# EAGLE board VCNL4040 Panel (EAGLE 7.7.0)
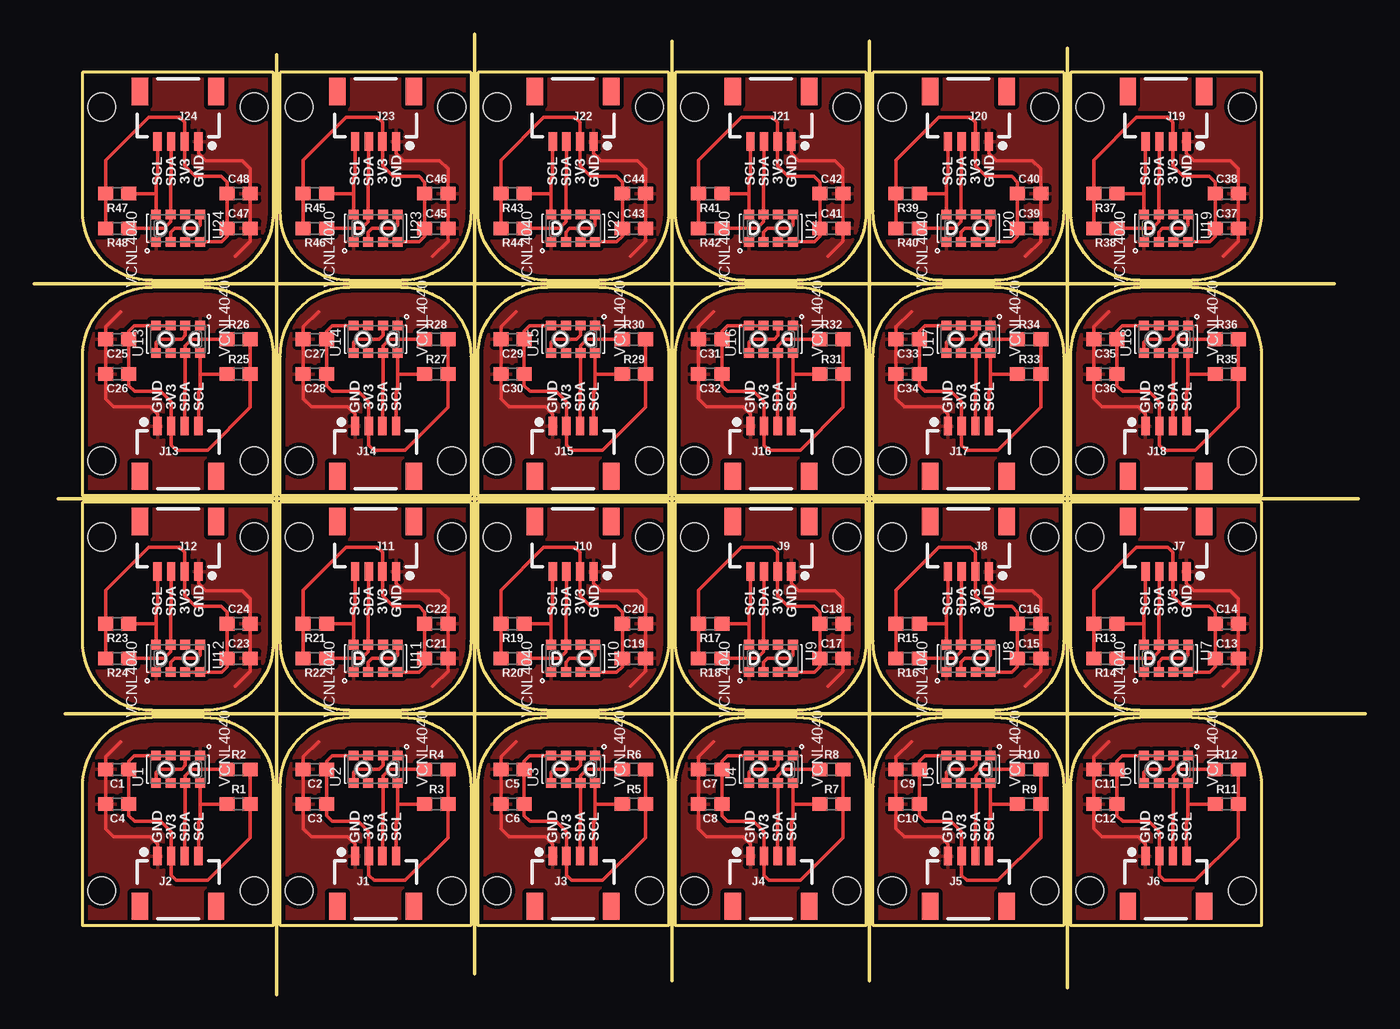
[diagram p0: board, top side]
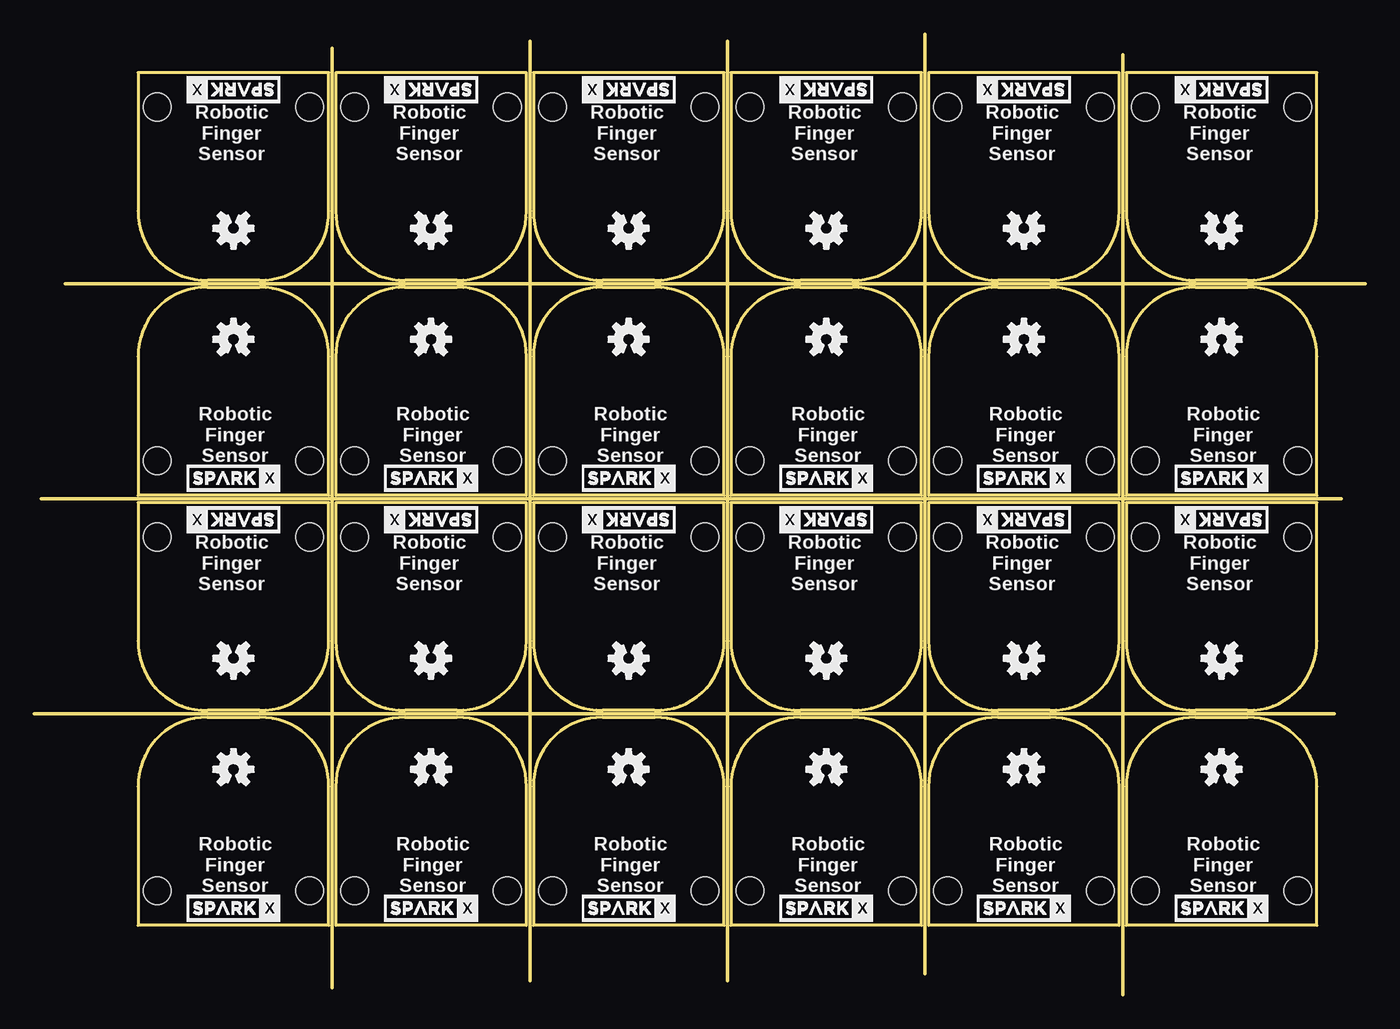
[diagram p1: board, bottom side, seen from below]

Size 97.54 x 70.36 mm. Coordinates in mm from the lower left corner, seen from the top.
Outline: 17.78,68.83 17.78,0
Outline: 32.26,70.36 32.26,1.52
Outline: 46.74,69.85 46.74,1.02
Outline: 61.21,69.85 61.21,1.02
Outline: 75.69,69.34 75.69,0.51
Outline: 2.29,20.57 97.54,20.57
Outline: 1.78,36.32 97.03,36.32
Outline: 0,52.07 95.25,52.07
Outline: 3.56,5.08 17.53,5.08 17.53,15.24 arc92 12.45,20.32 8.64,20.32 arc92 3.56,15.24 3.56,5.08
Outline: 18.03,5.08 32,5.08 32,15.24 arc92 26.92,20.32 23.11,20.32 arc92 18.03,15.24 18.03,5.08
Outline: 32.51,5.08 46.48,5.08 46.48,15.24 arc92 41.4,20.32 37.59,20.32 arc92 32.51,15.24 32.51,5.08
Outline: 46.99,5.08 60.96,5.08 60.96,15.24 arc92 55.88,20.32 52.07,20.32 arc92 46.99,15.24 46.99,5.08
Outline: 61.47,5.08 75.44,5.08 75.44,15.24 arc92 70.36,20.32 66.55,20.32 arc92 61.47,15.24 61.47,5.08
Outline: 75.95,5.08 89.92,5.08 89.92,15.24 arc92 84.84,20.32 81.03,20.32 arc92 75.95,15.24 75.95,5.08
Outline: 89.92,36.07 75.95,36.07 75.95,25.91 arc92 81.03,20.83 84.84,20.83 arc92 89.92,25.91 89.92,36.07
Outline: 75.44,36.07 61.47,36.07 61.47,25.91 arc92 66.55,20.83 70.36,20.83 arc92 75.44,25.91 75.44,36.07
Outline: 60.96,36.07 46.99,36.07 46.99,25.91 arc92 52.07,20.83 55.88,20.83 arc92 60.96,25.91 60.96,36.07
Outline: 46.48,36.07 32.51,36.07 32.51,25.91 arc92 37.59,20.83 41.4,20.83 arc92 46.48,25.91 46.48,36.07
Outline: 32,36.07 18.03,36.07 18.03,25.91 arc92 23.11,20.83 26.92,20.83 arc92 32,25.91 32,36.07
Outline: 17.53,36.07 3.56,36.07 3.56,25.91 arc92 8.64,20.83 12.45,20.83 arc92 17.53,25.91 17.53,36.07
Outline: 3.56,36.58 17.53,36.58 17.53,46.74 arc92 12.45,51.82 8.64,51.82 arc92 3.56,46.74 3.56,36.58
Outline: 18.03,36.58 32,36.58 32,46.74 arc92 26.92,51.82 23.11,51.82 arc92 18.03,46.74 18.03,36.58
Outline: 32.51,36.58 46.48,36.58 46.48,46.74 arc92 41.4,51.82 37.59,51.82 arc92 32.51,46.74 32.51,36.58
Outline: 46.99,36.58 60.96,36.58 60.96,46.74 arc92 55.88,51.82 52.07,51.82 arc92 46.99,46.74 46.99,36.58
Outline: 61.47,36.58 75.44,36.58 75.44,46.74 arc92 70.36,51.82 66.55,51.82 arc92 61.47,46.74 61.47,36.58
Outline: 75.95,36.58 89.92,36.58 89.92,46.74 arc92 84.84,51.82 81.03,51.82 arc92 75.95,46.74 75.95,36.58
Outline: 89.92,67.56 75.95,67.56 75.95,57.4 arc92 81.03,52.32 84.84,52.32 arc92 89.92,57.4 89.92,67.56
Outline: 75.44,67.56 61.47,67.56 61.47,57.4 arc92 66.55,52.32 70.36,52.32 arc92 75.44,57.4 75.44,67.56
Outline: 60.96,67.56 46.99,67.56 46.99,57.4 arc92 52.07,52.32 55.88,52.32 arc92 60.96,57.4 60.96,67.56
Outline: 46.48,67.56 32.51,67.56 32.51,57.4 arc92 37.59,52.32 41.4,52.32 arc92 46.48,57.4 46.48,67.56
Outline: 32,67.56 18.03,67.56 18.03,57.4 arc92 23.11,52.32 26.92,52.32 arc92 32,57.4 32,67.56
Outline: 17.53,67.56 3.56,67.56 3.56,57.4 arc92 8.64,52.32 12.45,52.32 arc92 17.53,57.4 17.53,67.56
Copper layers (1*16): Top 0.035mm / dielectric 1.5mm / Bottom 0.035mm
Design rules "SparkFun-2-layer-TIGHT": minimum track width 7mil, minimum drill 15mil, track to track 7mil, track to pad 7mil, pad to pad 7mil, via to via 7mil, smd to smd 7mil, copper to edge 7mil, drill to drill 7mil, minimum pad ring 7mil, minimum via ring 7mil, stop-mask expansion 4mil, vias tented up to drill 25mil, thermal gap 10mil

## Footprints (pad centres in the part's own frame; a part is rotated, then mirrored left to right if it is on the bottom)
0603 = smd 1.1 x 1: 1 -0.85,0; 2 0.85,0
1X04_1MM_RA = smd 0.6 x 1.35: 1 -1.5,0; 2 -0.5,0; 3 0.5,0; 4 1.5,0 | smd 1.2 x 2: NC1 2.8,-3.675; NC2 -2.8,-3.675
VCNL4040 = smd 0.7 x 0.725: 1 1,-1.613; 2 1,-0.537; 3 1,0.537; 4 1,1.613; 5 -1,1.613; 6 -1,0.537; 7 -1,-0.537; 8 -1,-1.613
STAND-OFF-#2 = hole 2.032: 0,0

## Placement (x,y rotation side)
C1  2.2uF  [0603]  6.1,16.51 180 top
C2  2.2uF  [0603]  20.57,16.51 180 top
C3  0.1uF  [0603]  20.57,13.97 180 top
C4  0.1uF  [0603]  6.1,13.97 180 top
C5  2.2uF  [0603]  35.05,16.51 180 top
C6  0.1uF  [0603]  35.05,13.97 180 top
C7  2.2uF  [0603]  49.53,16.51 180 top
C8  0.1uF  [0603]  49.53,13.97 180 top
C9  2.2uF  [0603]  64.01,16.51 180 top
C10  0.1uF  [0603]  64.01,13.97 180 top
C11  2.2uF  [0603]  78.49,16.51 180 top
C12  0.1uF  [0603]  78.49,13.97 180 top
C13  2.2uF  [0603]  87.38,24.64 0 top
C14  0.1uF  [0603]  87.38,27.18 0 top
C15  2.2uF  [0603]  72.9,24.64 0 top
C16  0.1uF  [0603]  72.9,27.18 0 top
C17  2.2uF  [0603]  58.42,24.64 0 top
C18  0.1uF  [0603]  58.42,27.18 0 top
C19  2.2uF  [0603]  43.94,24.64 0 top
C20  0.1uF  [0603]  43.94,27.18 0 top
C21  2.2uF  [0603]  29.46,24.64 0 top
C22  0.1uF  [0603]  29.46,27.18 0 top
C23  2.2uF  [0603]  14.99,24.64 0 top
C24  0.1uF  [0603]  14.99,27.18 0 top
C25  2.2uF  [0603]  6.1,48.01 180 top
C26  0.1uF  [0603]  6.1,45.47 180 top
C27  2.2uF  [0603]  20.57,48.01 180 top
C28  0.1uF  [0603]  20.57,45.47 180 top
C29  2.2uF  [0603]  35.05,48.01 180 top
C30  0.1uF  [0603]  35.05,45.47 180 top
C31  2.2uF  [0603]  49.53,48.01 180 top
C32  0.1uF  [0603]  49.53,45.47 180 top
C33  2.2uF  [0603]  64.01,48.01 180 top
C34  0.1uF  [0603]  64.01,45.47 180 top
C35  2.2uF  [0603]  78.49,48.01 180 top
C36  0.1uF  [0603]  78.49,45.47 180 top
C37  2.2uF  [0603]  87.38,56.13 0 top
C38  0.1uF  [0603]  87.38,58.67 0 top
C39  2.2uF  [0603]  72.9,56.13 0 top
C40  0.1uF  [0603]  72.9,58.67 0 top
C41  2.2uF  [0603]  58.42,56.13 0 top
C42  0.1uF  [0603]  58.42,58.67 0 top
C43  2.2uF  [0603]  43.94,56.13 0 top
C44  0.1uF  [0603]  43.94,58.67 0 top
C45  2.2uF  [0603]  29.46,56.13 0 top
C46  0.1uF  [0603]  29.46,58.67 0 top
C47  2.2uF  [0603]  14.99,56.13 0 top
C48  0.1uF  [0603]  14.99,58.67 0 top
J1  [1X04_1MM_RA]  25.02,10.16 0 top
J2  [1X04_1MM_RA]  10.54,10.16 0 top
J3  [1X04_1MM_RA]  39.5,10.16 0 top
J4  [1X04_1MM_RA]  53.97,10.16 0 top
J5  [1X04_1MM_RA]  68.45,10.16 0 top
J6  [1X04_1MM_RA]  82.93,10.16 0 top
J7  [1X04_1MM_RA]  82.93,30.99 180 top
J8  [1X04_1MM_RA]  68.45,30.99 180 top
J9  [1X04_1MM_RA]  53.97,30.99 180 top
J10  [1X04_1MM_RA]  39.5,30.99 180 top
J11  [1X04_1MM_RA]  25.02,30.99 180 top
J12  [1X04_1MM_RA]  10.54,30.99 180 top
J13  [1X04_1MM_RA]  10.54,41.66 0 top
J14  [1X04_1MM_RA]  25.02,41.66 0 top
J15  [1X04_1MM_RA]  39.5,41.66 0 top
J16  [1X04_1MM_RA]  53.97,41.66 0 top
J17  [1X04_1MM_RA]  68.45,41.66 0 top
J18  [1X04_1MM_RA]  82.93,41.66 0 top
J19  [1X04_1MM_RA]  82.93,62.48 180 top
J20  [1X04_1MM_RA]  68.45,62.48 180 top
J21  [1X04_1MM_RA]  53.97,62.48 180 top
J22  [1X04_1MM_RA]  39.5,62.48 180 top
J23  [1X04_1MM_RA]  25.02,62.48 180 top
J24  [1X04_1MM_RA]  10.54,62.48 180 top
R1  2.2k  [0603]  14.99,13.97 0 top
R2  2.2k  [0603]  14.99,16.51 0 top
R3  2.2k  [0603]  29.46,13.97 0 top
R4  2.2k  [0603]  29.46,16.51 0 top
R5  2.2k  [0603]  43.94,13.97 0 top
R6  2.2k  [0603]  43.94,16.51 0 top
R7  2.2k  [0603]  58.42,13.97 0 top
R8  2.2k  [0603]  58.42,16.51 0 top
R9  2.2k  [0603]  72.9,13.97 0 top
R10  2.2k  [0603]  72.9,16.51 0 top
R11  2.2k  [0603]  87.38,13.97 0 top
R12  2.2k  [0603]  87.38,16.51 0 top
R13  2.2k  [0603]  78.49,27.18 180 top
R14  2.2k  [0603]  78.49,24.64 180 top
R15  2.2k  [0603]  64.01,27.18 180 top
R16  2.2k  [0603]  64.01,24.64 180 top
R17  2.2k  [0603]  49.53,27.18 180 top
R18  2.2k  [0603]  49.53,24.64 180 top
R19  2.2k  [0603]  35.05,27.18 180 top
R20  2.2k  [0603]  35.05,24.64 180 top
R21  2.2k  [0603]  20.57,27.18 180 top
R22  2.2k  [0603]  20.57,24.64 180 top
R23  2.2k  [0603]  6.1,27.18 180 top
R24  2.2k  [0603]  6.1,24.64 180 top
R25  2.2k  [0603]  14.99,45.47 0 top
R26  2.2k  [0603]  14.99,48.01 0 top
R27  2.2k  [0603]  29.46,45.47 0 top
R28  2.2k  [0603]  29.46,48.01 0 top
R29  2.2k  [0603]  43.94,45.47 0 top
R30  2.2k  [0603]  43.94,48.01 0 top
R31  2.2k  [0603]  58.42,45.47 0 top
R32  2.2k  [0603]  58.42,48.01 0 top
R33  2.2k  [0603]  72.9,45.47 0 top
R34  2.2k  [0603]  72.9,48.01 0 top
R35  2.2k  [0603]  87.38,45.47 0 top
R36  2.2k  [0603]  87.38,48.01 0 top
R37  2.2k  [0603]  78.49,58.67 180 top
R38  2.2k  [0603]  78.49,56.13 180 top
R39  2.2k  [0603]  64.01,58.67 180 top
R40  2.2k  [0603]  64.01,56.13 180 top
R41  2.2k  [0603]  49.53,58.67 180 top
R42  2.2k  [0603]  49.53,56.13 180 top
R43  2.2k  [0603]  35.05,58.67 180 top
R44  2.2k  [0603]  35.05,56.13 180 top
R45  2.2k  [0603]  20.57,58.67 180 top
R46  2.2k  [0603]  20.57,56.13 180 top
R47  2.2k  [0603]  6.1,58.67 180 top
R48  2.2k  [0603]  6.1,56.13 180 top
U1  VCNL4040  [VCNL4040]  10.54,16.51 90 top
U2  VCNL4040  [VCNL4040]  25.02,16.51 90 top
U3  VCNL4040  [VCNL4040]  39.5,16.51 90 top
U4  VCNL4040  [VCNL4040]  53.97,16.51 90 top
U5  VCNL4040  [VCNL4040]  68.45,16.51 90 top
U6  VCNL4040  [VCNL4040]  82.93,16.51 90 top
U7  VCNL4040  [VCNL4040]  82.93,24.64 270 top
U8  VCNL4040  [VCNL4040]  68.45,24.64 270 top
U9  VCNL4040  [VCNL4040]  53.97,24.64 270 top
U10  VCNL4040  [VCNL4040]  39.5,24.64 270 top
U11  VCNL4040  [VCNL4040]  25.02,24.64 270 top
U12  VCNL4040  [VCNL4040]  10.54,24.64 270 top
U13  VCNL4040  [VCNL4040]  10.54,48.01 90 top
U14  VCNL4040  [VCNL4040]  25.02,48.01 90 top
U15  VCNL4040  [VCNL4040]  39.5,48.01 90 top
U16  VCNL4040  [VCNL4040]  53.97,48.01 90 top
U17  VCNL4040  [VCNL4040]  68.45,48.01 90 top
U18  VCNL4040  [VCNL4040]  82.93,48.01 90 top
U19  VCNL4040  [VCNL4040]  82.93,56.13 270 top
U20  VCNL4040  [VCNL4040]  68.45,56.13 270 top
U21  VCNL4040  [VCNL4040]  53.97,56.13 270 top
U22  VCNL4040  [VCNL4040]  39.5,56.13 270 top
U23  VCNL4040  [VCNL4040]  25.02,56.13 270 top
U24  VCNL4040  [VCNL4040]  10.54,56.13 270 top
U$1  OSHW-LOGOS  [OSHW-LOGO-S]  10.54,16.51 0 bottom
U$2  SPARKX-LOGO3  [SPARKX-SMALL]  10.54,6.35 0 bottom
U$3  STAND-OFF  [STAND-OFF-#2]  4.95,7.62 0 top
U$4  STAND-OFF  [STAND-OFF-#2]  16.13,7.62 0 top
U$5  OSHW-LOGOS  [OSHW-LOGO-S]  25.02,16.51 0 bottom
U$6  SPARKX-LOGO3  [SPARKX-SMALL]  25.02,6.35 0 bottom
U$7  STAND-OFF  [STAND-OFF-#2]  19.43,7.62 0 top
U$8  STAND-OFF  [STAND-OFF-#2]  30.61,7.62 0 top
U$9  OSHW-LOGOS  [OSHW-LOGO-S]  39.5,16.51 0 bottom
U$10  SPARKX-LOGO3  [SPARKX-SMALL]  39.5,6.35 0 bottom
U$11  STAND-OFF  [STAND-OFF-#2]  33.91,7.62 0 top
U$12  STAND-OFF  [STAND-OFF-#2]  45.09,7.62 0 top
U$13  OSHW-LOGOS  [OSHW-LOGO-S]  53.97,16.51 0 bottom
U$14  SPARKX-LOGO3  [SPARKX-SMALL]  53.97,6.35 0 bottom
U$15  STAND-OFF  [STAND-OFF-#2]  48.39,7.62 0 top
U$16  STAND-OFF  [STAND-OFF-#2]  59.56,7.62 0 top
U$17  OSHW-LOGOS  [OSHW-LOGO-S]  68.45,16.51 0 bottom
U$18  SPARKX-LOGO3  [SPARKX-SMALL]  68.45,6.35 0 bottom
U$19  STAND-OFF  [STAND-OFF-#2]  62.86,7.62 0 top
U$20  STAND-OFF  [STAND-OFF-#2]  74.04,7.62 0 top
U$21  OSHW-LOGOS  [OSHW-LOGO-S]  82.93,16.51 0 bottom
U$22  SPARKX-LOGO3  [SPARKX-SMALL]  82.93,6.35 0 bottom
U$23  STAND-OFF  [STAND-OFF-#2]  77.34,7.62 0 top
U$24  STAND-OFF  [STAND-OFF-#2]  88.52,7.62 0 top
U$25  OSHW-LOGOS  [OSHW-LOGO-S]  82.93,24.64 180 bottom
U$26  SPARKX-LOGO3  [SPARKX-SMALL]  82.93,34.8 180 bottom
U$27  STAND-OFF  [STAND-OFF-#2]  88.52,33.53 180 top
U$28  STAND-OFF  [STAND-OFF-#2]  77.34,33.53 180 top
U$29  OSHW-LOGOS  [OSHW-LOGO-S]  68.45,24.64 180 bottom
U$30  SPARKX-LOGO3  [SPARKX-SMALL]  68.45,34.8 180 bottom
U$31  STAND-OFF  [STAND-OFF-#2]  74.04,33.53 180 top
U$32  STAND-OFF  [STAND-OFF-#2]  62.86,33.53 180 top
U$33  OSHW-LOGOS  [OSHW-LOGO-S]  53.97,24.64 180 bottom
U$34  SPARKX-LOGO3  [SPARKX-SMALL]  53.97,34.8 180 bottom
U$35  STAND-OFF  [STAND-OFF-#2]  59.56,33.53 180 top
U$36  STAND-OFF  [STAND-OFF-#2]  48.39,33.53 180 top
U$37  OSHW-LOGOS  [OSHW-LOGO-S]  39.5,24.64 180 bottom
U$38  SPARKX-LOGO3  [SPARKX-SMALL]  39.5,34.8 180 bottom
U$39  STAND-OFF  [STAND-OFF-#2]  45.09,33.53 180 top
U$40  STAND-OFF  [STAND-OFF-#2]  33.91,33.53 180 top
U$41  OSHW-LOGOS  [OSHW-LOGO-S]  25.02,24.64 180 bottom
U$42  SPARKX-LOGO3  [SPARKX-SMALL]  25.02,34.8 180 bottom
U$43  STAND-OFF  [STAND-OFF-#2]  30.61,33.53 180 top
U$44  STAND-OFF  [STAND-OFF-#2]  19.43,33.53 180 top
U$45  OSHW-LOGOS  [OSHW-LOGO-S]  10.54,24.64 180 bottom
U$46  SPARKX-LOGO3  [SPARKX-SMALL]  10.54,34.8 180 bottom
U$47  STAND-OFF  [STAND-OFF-#2]  16.13,33.53 180 top
U$48  STAND-OFF  [STAND-OFF-#2]  4.95,33.53 180 top
U$49  OSHW-LOGOS  [OSHW-LOGO-S]  10.54,48.01 0 bottom
U$50  SPARKX-LOGO3  [SPARKX-SMALL]  10.54,37.85 0 bottom
U$51  STAND-OFF  [STAND-OFF-#2]  4.95,39.12 0 top
U$52  STAND-OFF  [STAND-OFF-#2]  16.13,39.12 0 top
U$53  OSHW-LOGOS  [OSHW-LOGO-S]  25.02,48.01 0 bottom
U$54  SPARKX-LOGO3  [SPARKX-SMALL]  25.02,37.85 0 bottom
U$55  STAND-OFF  [STAND-OFF-#2]  19.43,39.12 0 top
U$56  STAND-OFF  [STAND-OFF-#2]  30.61,39.12 0 top
U$57  OSHW-LOGOS  [OSHW-LOGO-S]  39.5,48.01 0 bottom
U$58  SPARKX-LOGO3  [SPARKX-SMALL]  39.5,37.85 0 bottom
U$59  STAND-OFF  [STAND-OFF-#2]  33.91,39.12 0 top
U$60  STAND-OFF  [STAND-OFF-#2]  45.09,39.12 0 top
U$61  OSHW-LOGOS  [OSHW-LOGO-S]  53.97,48.01 0 bottom
U$62  SPARKX-LOGO3  [SPARKX-SMALL]  53.97,37.85 0 bottom
U$63  STAND-OFF  [STAND-OFF-#2]  48.39,39.12 0 top
U$64  STAND-OFF  [STAND-OFF-#2]  59.56,39.12 0 top
U$65  OSHW-LOGOS  [OSHW-LOGO-S]  68.45,48.01 0 bottom
U$66  SPARKX-LOGO3  [SPARKX-SMALL]  68.45,37.85 0 bottom
U$67  STAND-OFF  [STAND-OFF-#2]  62.86,39.12 0 top
U$68  STAND-OFF  [STAND-OFF-#2]  74.04,39.12 0 top
U$69  OSHW-LOGOS  [OSHW-LOGO-S]  82.93,48.01 0 bottom
U$70  SPARKX-LOGO3  [SPARKX-SMALL]  82.93,37.85 0 bottom
U$71  STAND-OFF  [STAND-OFF-#2]  77.34,39.12 0 top
U$72  STAND-OFF  [STAND-OFF-#2]  88.52,39.12 0 top
U$73  OSHW-LOGOS  [OSHW-LOGO-S]  82.93,56.13 180 bottom
U$74  SPARKX-LOGO3  [SPARKX-SMALL]  82.93,66.29 180 bottom
U$75  STAND-OFF  [STAND-OFF-#2]  88.52,65.02 180 top
U$76  STAND-OFF  [STAND-OFF-#2]  77.34,65.02 180 top
U$77  OSHW-LOGOS  [OSHW-LOGO-S]  68.45,56.13 180 bottom
U$78  SPARKX-LOGO3  [SPARKX-SMALL]  68.45,66.29 180 bottom
U$79  STAND-OFF  [STAND-OFF-#2]  74.04,65.02 180 top
U$80  STAND-OFF  [STAND-OFF-#2]  62.86,65.02 180 top
U$81  OSHW-LOGOS  [OSHW-LOGO-S]  53.97,56.13 180 bottom
U$82  SPARKX-LOGO3  [SPARKX-SMALL]  53.97,66.29 180 bottom
U$83  STAND-OFF  [STAND-OFF-#2]  59.56,65.02 180 top
U$84  STAND-OFF  [STAND-OFF-#2]  48.39,65.02 180 top
U$85  OSHW-LOGOS  [OSHW-LOGO-S]  39.5,56.13 180 bottom
U$86  SPARKX-LOGO3  [SPARKX-SMALL]  39.5,66.29 180 bottom
U$87  STAND-OFF  [STAND-OFF-#2]  45.09,65.02 180 top
U$88  STAND-OFF  [STAND-OFF-#2]  33.91,65.02 180 top
U$89  OSHW-LOGOS  [OSHW-LOGO-S]  25.02,56.13 180 bottom
U$90  SPARKX-LOGO3  [SPARKX-SMALL]  25.02,66.29 180 bottom
U$91  STAND-OFF  [STAND-OFF-#2]  30.61,65.02 180 top
U$92  STAND-OFF  [STAND-OFF-#2]  19.43,65.02 180 top
U$93  OSHW-LOGOS  [OSHW-LOGO-S]  10.54,56.13 180 bottom
U$94  SPARKX-LOGO3  [SPARKX-SMALL]  10.54,66.29 180 bottom
U$95  STAND-OFF  [STAND-OFF-#2]  16.13,65.02 180 top
U$96  STAND-OFF  [STAND-OFF-#2]  4.95,65.02 180 top

## Library data of the parts
C1 C2 C5 C7 C9 C11 C13 C15 C17 C19 C21 C23 C25 C27 C29 C31 C33 C35 C37 C39 C41 C43 C45 C47 = SparkFun-Capacitors; PROD_ID: CAP-07888
C3 C4 C6 C8 C10 C12 C14 C16 C18 C20 C22 C24 C26 C28 C30 C32 C34 C36 C38 C40 C42 C44 C46 C48 = SparkFun-Capacitors; PROD_ID: CAP-00810
J1-J24 U1-U24 U$2-U$4 U$6-U$8 U$10-U$12 U$14-U$16 U$18-U$20 U$22-U$24 U$26-U$28 U$30-U$32 U$34-U$36 U$38-U$40 U$42-U$44 U$46-U$48 U$50-U$52 U$54-U$56 U$58-U$60 U$62-U$64 U$66-U$68 U$70-U$72 U$74-U$76 U$78-U$80 U$82-U$84 U$86-U$88 U$90-U$92 U$94-U$96 = SparkX
R1-R48 = SparkFun-Resistors; PROD_ID: RES-08272
U$1 U$5 U$9 U$13 U$17 U$21 U$25 U$29 U$33 U$37 U$41 U$45 U$49 U$53 U$57 U$61 U$65 U$69 U$73 U$77 U$81 U$85 U$89 U$93 = SparkFun

## Nets
3.3V: C1.1 C4.1 J2.2 R1.2 R2.2 U1.3 U1.4
3.3V1: C2.1 C3.1 J1.2 R3.2 R4.2 U2.3 U2.4
3.3V2: C5.1 C6.1 J3.2 R5.2 R6.2 U3.3 U3.4
3.3V3: C7.1 C8.1 J4.2 R7.2 R8.2 U4.3 U4.4
3.3V4: C9.1 C10.1 J5.2 R9.2 R10.2 U5.3 U5.4
3.3V5: C11.1 C12.1 J6.2 R11.2 R12.2 U6.3 U6.4
3.3V6: C13.1 C14.1 J7.2 R13.2 R14.2 U7.3 U7.4
3.3V7: C15.1 C16.1 J8.2 R15.2 R16.2 U8.3 U8.4
3.3V8: C17.1 C18.1 J9.2 R17.2 R18.2 U9.3 U9.4
3.3V9: C19.1 C20.1 J10.2 R19.2 R20.2 U10.3 U10.4
3.3V10: C21.1 C22.1 J11.2 R21.2 R22.2 U11.3 U11.4
3.3V11: C23.1 C24.1 J12.2 R23.2 R24.2 U12.3 U12.4
3.3V12: C25.1 C26.1 J13.2 R25.2 R26.2 U13.3 U13.4
3.3V13: C27.1 C28.1 J14.2 R27.2 R28.2 U14.3 U14.4
3.3V14: C29.1 C30.1 J15.2 R29.2 R30.2 U15.3 U15.4
3.3V15: C31.1 C32.1 J16.2 R31.2 R32.2 U16.3 U16.4
3.3V16: C33.1 C34.1 J17.2 R33.2 R34.2 U17.3 U17.4
3.3V17: C35.1 C36.1 J18.2 R35.2 R36.2 U18.3 U18.4
3.3V18: C37.1 C38.1 J19.2 R37.2 R38.2 U19.3 U19.4
3.3V19: C39.1 C40.1 J20.2 R39.2 R40.2 U20.3 U20.4
3.3V20: C41.1 C42.1 J21.2 R41.2 R42.2 U21.3 U21.4
3.3V21: C43.1 C44.1 J22.2 R43.2 R44.2 U22.3 U22.4
3.3V22: C45.1 C46.1 J23.2 R45.2 R46.2 U23.3 U23.4
3.3V23: C47.1 C48.1 J24.2 R47.2 R48.2 U24.3 U24.4
GND: C1.2 C4.2 J2.1 U1.1
GND1: C2.2 C3.2 J1.1 U2.1
GND2: C5.2 C6.2 J3.1 U3.1
GND3: C7.2 C8.2 J4.1 U4.1
GND4: C9.2 C10.2 J5.1 U5.1
GND5: C11.2 C12.2 J6.1 U6.1
GND6: C13.2 C14.2 J7.1 U7.1
GND7: C15.2 C16.2 J8.1 U8.1
GND8: C17.2 C18.2 J9.1 U9.1
GND9: C19.2 C20.2 J10.1 U10.1
GND10: C21.2 C22.2 J11.1 U11.1
GND11: C23.2 C24.2 J12.1 U12.1
GND12: C25.2 C26.2 J13.1 U13.1
GND13: C27.2 C28.2 J14.1 U14.1
GND14: C29.2 C30.2 J15.1 U15.1
GND15: C31.2 C32.2 J16.1 U16.1
GND16: C33.2 C34.2 J17.1 U17.1
GND17: C35.2 C36.2 J18.1 U18.1
GND18: C37.2 C38.2 J19.1 U19.1
GND19: C39.2 C40.2 J20.1 U20.1
GND20: C41.2 C42.2 J21.1 U21.1
GND21: C43.2 C44.2 J22.1 U22.1
GND22: C45.2 C46.2 J23.1 U23.1
GND23: C47.2 C48.2 J24.1 U24.1
N$1: U1.2 U1.5
N$2: U2.2 U2.5
N$3: U3.2 U3.5
N$4: U4.2 U4.5
N$5: U5.2 U5.5
N$6: U6.2 U6.5
N$7: U7.2 U7.5
N$8: U8.2 U8.5
N$9: U9.2 U9.5
N$10: U10.2 U10.5
N$11: U11.2 U11.5
N$12: U12.2 U12.5
N$13: U13.2 U13.5
N$14: U14.2 U14.5
N$15: U15.2 U15.5
N$16: U16.2 U16.5
N$17: U17.2 U17.5
N$18: U18.2 U18.5
N$19: U19.2 U19.5
N$20: U20.2 U20.5
N$21: U21.2 U21.5
N$22: U22.2 U22.5
N$23: U23.2 U23.5
N$24: U24.2 U24.5
SCL: J2.4 R1.1 U1.8
SCL1: J1.4 R3.1 U2.8
SCL2: J3.4 R5.1 U3.8
SCL3: J4.4 R7.1 U4.8
SCL4: J5.4 R9.1 U5.8
SCL5: J6.4 R11.1 U6.8
SCL6: J7.4 R13.1 U7.8
SCL7: J8.4 R15.1 U8.8
SCL8: J9.4 R17.1 U9.8
SCL9: J10.4 R19.1 U10.8
SCL10: J11.4 R21.1 U11.8
SCL11: J12.4 R23.1 U12.8
SCL12: J13.4 R25.1 U13.8
SCL13: J14.4 R27.1 U14.8
SCL14: J15.4 R29.1 U15.8
SCL15: J16.4 R31.1 U16.8
SCL16: J17.4 R33.1 U17.8
SCL17: J18.4 R35.1 U18.8
SCL18: J19.4 R37.1 U19.8
SCL19: J20.4 R39.1 U20.8
SCL20: J21.4 R41.1 U21.8
SCL21: J22.4 R43.1 U22.8
SCL22: J23.4 R45.1 U23.8
SCL23: J24.4 R47.1 U24.8
SDA: J2.3 R2.1 U1.7
SDA1: J1.3 R4.1 U2.7
SDA2: J3.3 R6.1 U3.7
SDA3: J4.3 R8.1 U4.7
SDA4: J5.3 R10.1 U5.7
SDA5: J6.3 R12.1 U6.7
SDA6: J7.3 R14.1 U7.7
SDA7: J8.3 R16.1 U8.7
SDA8: J9.3 R18.1 U9.7
SDA9: J10.3 R20.1 U10.7
SDA10: J11.3 R22.1 U11.7
SDA11: J12.3 R24.1 U12.7
SDA12: J13.3 R26.1 U13.7
SDA13: J14.3 R28.1 U14.7
SDA14: J15.3 R30.1 U15.7
SDA15: J16.3 R32.1 U16.7
SDA16: J17.3 R34.1 U17.7
SDA17: J18.3 R36.1 U18.7
SDA18: J19.3 R38.1 U19.7
SDA19: J20.3 R40.1 U20.7
SDA20: J21.3 R42.1 U21.7
SDA21: J22.3 R44.1 U22.7
SDA22: J23.3 R46.1 U23.7
SDA23: J24.3 R48.1 U24.7

## Tracks (layer width: path | path; a pad name or v marks a point on that pad's centre or on a via)
3.3V
  Top 0.254: R2.2 R1.2 15.84,11.52 12.7,8.38 10.41,8.38 10.04,8.75 J2.2 10.04,11.93 9.27,12.7 7.37,12.7 6.95,13.12 C4.1 C1.1 6.95,17.11 7.35,17.51 U1.4 U1.3
3.3V1
  Top 0.254: R4.2 R3.2 30.31,11.52 27.18,8.38 24.89,8.38 24.52,8.75 J1.2 24.52,11.93 23.75,12.7 21.84,12.7 21.42,13.12 C3.1 C2.1 21.42,17.11 21.83,17.51 U2.4 U2.3
3.3V2
  Top 0.254: R6.2 R5.2 44.79,11.52 41.66,8.38 39.37,8.38 39,8.75 J3.2 39,11.93 38.23,12.7 36.32,12.7 35.9,13.12 C6.1 C5.1 35.9,17.11 36.31,17.51 U3.4 U3.3
3.3V3
  Top 0.254: R8.2 R7.2 59.27,11.52 56.13,8.38 53.85,8.38 53.47,8.75 J4.2 53.47,11.93 52.7,12.7 50.8,12.7 50.38,13.12 C8.1 C7.1 50.38,17.11 50.78,17.51 U4.4 U4.3
3.3V4
  Top 0.254: R10.2 R9.2 73.75,11.52 70.61,8.38 68.33,8.38 67.95,8.75 J5.2 67.95,11.93 67.18,12.7 65.28,12.7 64.86,13.12 C10.1 C9.1 64.86,17.11 65.26,17.51 U5.4 U5.3
3.3V5
  Top 0.254: R12.2 R11.2 88.23,11.52 85.09,8.38 82.8,8.38 82.43,8.75 J6.2 82.43,11.93 81.66,12.7 79.76,12.7 79.34,13.12 C12.1 C11.1 79.34,17.11 79.74,17.51 U6.4 U6.3
3.3V6
  Top 0.254: R14.2 R13.2 77.64,29.63 80.77,32.77 83.06,32.77 83.43,32.39 J7.2 83.43,29.22 84.2,28.45 86.11,28.45 86.53,28.03 C14.1 C13.1 86.53,24.04 86.12,23.64 U7.4 U7.3
3.3V7
  Top 0.254: R16.2 R15.2 63.16,29.63 66.29,32.77 68.58,32.77 68.95,32.39 J8.2 68.95,29.22 69.72,28.45 71.63,28.45 72.05,28.03 C16.1 C15.1 72.05,24.04 71.64,23.64 U8.4 U8.3
3.3V8
  Top 0.254: R18.2 R17.2 48.68,29.63 51.82,32.77 54.1,32.77 54.47,32.39 J9.2 54.47,29.22 55.24,28.45 57.15,28.45 57.57,28.03 C18.1 C17.1 57.57,24.04 57.17,23.64 U9.4 U9.3
3.3V9
  Top 0.254: R20.2 R19.2 34.2,29.63 37.34,32.77 39.62,32.77 40,32.39 J10.2 40,29.22 40.77,28.45 42.67,28.45 43.09,28.03 C20.1 C19.1 43.09,24.04 42.69,23.64 U10.4 U10.3
3.3V10
  Top 0.254: R22.2 R21.2 19.72,29.63 22.86,32.77 25.15,32.77 25.52,32.39 J11.2 25.52,29.22 26.29,28.45 28.19,28.45 28.61,28.03 C22.1 C21.1 28.61,24.04 28.21,23.64 U11.4 U11.3
3.3V11
  Top 0.254: R24.2 R23.2 5.25,29.63 8.38,32.77 10.67,32.77 11.04,32.39 J12.2 11.04,29.22 11.81,28.45 13.72,28.45 14.14,28.03 C24.1 C23.1 14.14,24.04 13.73,23.64 U12.4 U12.3
3.3V12
  Top 0.254: R26.2 R25.2 15.84,43.01 12.7,39.88 10.41,39.88 10.04,40.25 J13.2 10.04,43.43 9.27,44.2 7.37,44.2 6.95,44.62 C26.1 C25.1 6.95,48.6 7.35,49.01 U13.4 U13.3
3.3V13
  Top 0.254: R28.2 R27.2 30.31,43.01 27.18,39.88 24.89,39.88 24.52,40.25 J14.2 24.52,43.43 23.75,44.2 21.84,44.2 21.42,44.62 C28.1 C27.1 21.42,48.6 21.83,49.01 U14.4 U14.3
3.3V14
  Top 0.254: R30.2 R29.2 44.79,43.01 41.66,39.88 39.37,39.88 39,40.25 J15.2 39,43.43 38.23,44.2 36.32,44.2 35.9,44.62 C30.1 C29.1 35.9,48.6 36.31,49.01 U15.4 U15.3
3.3V15
  Top 0.254: R32.2 R31.2 59.27,43.01 56.13,39.88 53.85,39.88 53.47,40.25 J16.2 53.47,43.43 52.7,44.2 50.8,44.2 50.38,44.62 C32.1 C31.1 50.38,48.6 50.78,49.01 U16.4 U16.3
3.3V16
  Top 0.254: R34.2 R33.2 73.75,43.01 70.61,39.88 68.33,39.88 67.95,40.25 J17.2 67.95,43.43 67.18,44.2 65.28,44.2 64.86,44.62 C34.1 C33.1 64.86,48.6 65.26,49.01 U17.4 U17.3
3.3V17
  Top 0.254: R36.2 R35.2 88.23,43.01 85.09,39.88 82.8,39.88 82.43,40.25 J18.2 82.43,43.43 81.66,44.2 79.76,44.2 79.34,44.62 C36.1 C35.1 79.34,48.6 79.74,49.01 U18.4 U18.3
3.3V18
  Top 0.254: R38.2 R37.2 77.64,61.13 80.77,64.26 83.06,64.26 83.43,63.89 J19.2 83.43,60.71 84.2,59.94 86.11,59.94 86.53,59.52 C38.1 C37.1 86.53,55.54 86.12,55.13 U19.4 U19.3
3.3V19
  Top 0.254: R40.2 R39.2 63.16,61.13 66.29,64.26 68.58,64.26 68.95,63.89 J20.2 68.95,60.71 69.72,59.94 71.63,59.94 72.05,59.52 C40.1 C39.1 72.05,55.54 71.64,55.13 U20.4 U20.3
3.3V20
  Top 0.254: R42.2 R41.2 48.68,61.13 51.82,64.26 54.1,64.26 54.47,63.89 J21.2 54.47,60.71 55.24,59.94 57.15,59.94 57.57,59.52 C42.1 C41.1 57.57,55.54 57.17,55.13 U21.4 U21.3
3.3V21
  Top 0.254: R44.2 R43.2 34.2,61.13 37.34,64.26 39.62,64.26 40,63.89 J22.2 40,60.71 40.77,59.94 42.67,59.94 43.09,59.52 C44.1 C43.1 43.09,55.54 42.69,55.13 U22.4 U22.3
3.3V22
  Top 0.254: R46.2 R45.2 19.72,61.13 22.86,64.26 25.15,64.26 25.52,63.89 J23.2 25.52,60.71 26.29,59.94 28.19,59.94 28.61,59.52 C46.1 C45.1 28.61,55.54 28.21,55.13 U23.4 U23.3
3.3V23
  Top 0.254: R48.2 R47.2 5.25,61.13 8.38,64.26 10.67,64.26 11.04,63.89 J24.2 11.04,60.71 11.81,59.94 13.72,59.94 14.14,59.52 C48.1 C47.1 14.14,55.54 13.73,55.13 U24.4 U24.3
GND
  Top 0.254: J2.1 9.04,11.03 8.51,11.56 5.84,11.56 5.25,12.15 C4.2 C1.2 5.25,17.44 6.35,18.54
  pour Top (isolate 0.305): 3.56,5.08 3.56,20.32 17.53,20.32 17.53,5.08
GND1
  Top 0.254: J1.1 23.52,11.03 22.99,11.56 20.32,11.56 19.72,12.15 C3.2 C2.2 19.72,17.44 20.83,18.54
  pour Top (isolate 0.305): 18.03,5.08 18.03,20.32 32,20.32 32,5.08
GND2
  Top 0.254: J3.1 38,11.03 37.46,11.56 34.8,11.56 34.2,12.15 C6.2 C5.2 34.2,17.44 35.31,18.54
  pour Top (isolate 0.305): 32.51,5.08 32.51,20.32 46.48,20.32 46.48,5.08
GND3
  Top 0.254: J4.1 52.47,11.03 51.94,11.56 49.28,11.56 48.68,12.15 C8.2 C7.2 48.68,17.44 49.78,18.54
  pour Top (isolate 0.305): 46.99,5.08 46.99,20.32 60.96,20.32 60.96,5.08
GND4
  Top 0.254: J5.1 66.95,11.03 66.42,11.56 63.75,11.56 63.16,12.15 C10.2 C9.2 63.16,17.44 64.26,18.54
  pour Top (isolate 0.305): 61.47,5.08 61.47,20.32 75.44,20.32 75.44,5.08
GND5
  Top 0.254: J6.1 81.43,11.03 80.9,11.56 78.23,11.56 77.64,12.15 C12.2 C11.2 77.64,17.44 78.74,18.54
  pour Top (isolate 0.305): 75.95,5.08 75.95,20.32 89.92,20.32 89.92,5.08
GND6
  Top 0.254: J7.1 84.43,30.12 84.96,29.59 87.63,29.59 88.23,28.99 C14.2 C13.2 88.23,23.71 87.12,22.61
  pour Top (isolate 0.305): 89.92,36.07 89.92,20.83 75.95,20.83 75.95,36.07
GND7
  Top 0.254: J8.1 69.95,30.12 70.48,29.59 73.15,29.59 73.75,28.99 C16.2 C15.2 73.75,23.71 72.64,22.61
  pour Top (isolate 0.305): 75.44,36.07 75.44,20.83 61.47,20.83 61.47,36.07
GND8
  Top 0.254: J9.1 55.47,30.12 56.01,29.59 58.67,29.59 59.27,28.99 C18.2 C17.2 59.27,23.71 58.17,22.61
  pour Top (isolate 0.305): 60.96,36.07 60.96,20.83 46.99,20.83 46.99,36.07
GND9
  Top 0.254: J10.1 41,30.12 41.53,29.59 44.2,29.59 44.79,28.99 C20.2 C19.2 44.79,23.71 43.69,22.61
  pour Top (isolate 0.305): 46.48,36.07 46.48,20.83 32.51,20.83 32.51,36.07
GND10
  Top 0.254: J11.1 26.52,30.12 27.05,29.59 29.72,29.59 30.31,28.99 C22.2 C21.2 30.31,23.71 29.21,22.61
  pour Top (isolate 0.305): 32,36.07 32,20.83 18.03,20.83 18.03,36.07
GND11
  Top 0.254: J12.1 12.04,30.12 12.57,29.59 15.24,29.59 15.84,28.99 C24.2 C23.2 15.84,23.71 14.73,22.61
  pour Top (isolate 0.305): 17.53,36.07 17.53,20.83 3.56,20.83 3.56,36.07
GND12
  Top 0.254: J13.1 9.04,42.52 8.51,43.05 5.84,43.05 5.25,43.65 C26.2 C25.2 5.25,48.93 6.35,50.04
  pour Top (isolate 0.305): 3.56,36.58 3.56,51.82 17.53,51.82 17.53,36.58
GND13
  Top 0.254: J14.1 23.52,42.52 22.99,43.05 20.32,43.05 19.72,43.65 C28.2 C27.2 19.72,48.93 20.83,50.04
  pour Top (isolate 0.305): 18.03,36.58 18.03,51.82 32,51.82 32,36.58
GND14
  Top 0.254: J15.1 38,42.52 37.46,43.05 34.8,43.05 34.2,43.65 C30.2 C29.2 34.2,48.93 35.31,50.04
  pour Top (isolate 0.305): 32.51,36.58 32.51,51.82 46.48,51.82 46.48,36.58
GND15
  Top 0.254: J16.1 52.47,42.52 51.94,43.05 49.28,43.05 48.68,43.65 C32.2 C31.2 48.68,48.93 49.78,50.04
  pour Top (isolate 0.305): 46.99,36.58 46.99,51.82 60.96,51.82 60.96,36.58
GND16
  Top 0.254: J17.1 66.95,42.52 66.42,43.05 63.75,43.05 63.16,43.65 C34.2 C33.2 63.16,48.93 64.26,50.04
  pour Top (isolate 0.305): 61.47,36.58 61.47,51.82 75.44,51.82 75.44,36.58
GND17
  Top 0.254: J18.1 81.43,42.52 80.9,43.05 78.23,43.05 77.64,43.65 C36.2 C35.2 77.64,48.93 78.74,50.04
  pour Top (isolate 0.305): 75.95,36.58 75.95,51.82 89.92,51.82 89.92,36.58
GND18
  Top 0.254: J19.1 84.43,61.62 84.96,61.09 87.63,61.09 88.23,60.49 C38.2 C37.2 88.23,55.21 87.12,54.1
  pour Top (isolate 0.305): 89.92,67.56 89.92,52.32 75.95,52.32 75.95,67.56
GND19
  Top 0.254: J20.1 69.95,61.62 70.48,61.09 73.15,61.09 73.75,60.49 C40.2 C39.2 73.75,55.21 72.64,54.1
  pour Top (isolate 0.305): 75.44,67.56 75.44,52.32 61.47,52.32 61.47,67.56
GND20
  Top 0.254: J21.1 55.47,61.62 56.01,61.09 58.67,61.09 59.27,60.49 C42.2 C41.2 59.27,55.21 58.17,54.1
  pour Top (isolate 0.305): 60.96,67.56 60.96,52.32 46.99,52.32 46.99,67.56
GND21
  Top 0.254: J22.1 41,61.62 41.53,61.09 44.2,61.09 44.79,60.49 C44.2 C43.2 44.79,55.21 43.69,54.1
  pour Top (isolate 0.305): 46.48,67.56 46.48,52.32 32.51,52.32 32.51,67.56
GND22
  Top 0.254: J23.1 26.52,61.62 27.05,61.09 29.72,61.09 30.31,60.49 C46.2 C45.2 30.31,55.21 29.21,54.1
  pour Top (isolate 0.305): 32,67.56 32,52.32 18.03,52.32 18.03,67.56
GND23
  Top 0.254: J24.1 12.04,61.62 12.57,61.09 15.24,61.09 15.84,60.49 C48.2 C47.2 15.84,55.21 14.73,54.1
  pour Top (isolate 0.305): 17.53,67.56 17.53,52.32 3.56,52.32 3.56,67.56
N$1
  Top 0.254: U1.2 11.08,16.79 10.79,16.51 9.14,16.51 8.93,16.29 U1.5
N$2
  Top 0.254: U2.2 25.56,16.79 25.27,16.51 23.62,16.51 23.41,16.29 U2.5
N$3
  Top 0.254: U3.2 40.03,16.79 39.75,16.51 38.1,16.51 37.88,16.29 U3.5
N$4
  Top 0.254: U4.2 54.51,16.79 54.23,16.51 52.58,16.51 52.36,16.29 U4.5
N$5
  Top 0.254: U5.2 68.99,16.79 68.71,16.51 67.06,16.51 66.84,16.29 U5.5
N$6
  Top 0.254: U6.2 83.47,16.79 83.19,16.51 81.53,16.51 81.32,16.29 U6.5
N$7
  Top 0.254: U7.2 82.39,24.35 82.68,24.64 84.33,24.64 84.54,24.85 U7.5
N$8
  Top 0.254: U8.2 67.91,24.35 68.2,24.64 69.85,24.64 70.07,24.85 U8.5
N$9
  Top 0.254: U9.2 53.44,24.35 53.72,24.64 55.37,24.64 55.59,24.85 U9.5
N$10
  Top 0.254: U10.2 38.96,24.35 39.24,24.64 40.89,24.64 41.11,24.85 U10.5
N$11
  Top 0.254: U11.2 24.48,24.35 24.77,24.64 26.42,24.64 26.63,24.85 U11.5
N$12
  Top 0.254: U12.2 10,24.35 10.29,24.64 11.94,24.64 12.15,24.85 U12.5
N$13
  Top 0.254: U13.2 11.08,48.29 10.79,48.01 9.14,48.01 8.93,47.79 U13.5
N$14
  Top 0.254: U14.2 25.56,48.29 25.27,48.01 23.62,48.01 23.41,47.79 U14.5
N$15
  Top 0.254: U15.2 40.03,48.29 39.75,48.01 38.1,48.01 37.88,47.79 U15.5
N$16
  Top 0.254: U16.2 54.51,48.29 54.23,48.01 52.58,48.01 52.36,47.79 U16.5
N$17
  Top 0.254: U17.2 68.99,48.29 68.71,48.01 67.06,48.01 66.84,47.79 U17.5
N$18
  Top 0.254: U18.2 83.47,48.29 83.19,48.01 81.53,48.01 81.32,47.79 U18.5
N$19
  Top 0.254: U19.2 82.39,55.85 82.68,56.13 84.33,56.13 84.54,56.35 U19.5
N$20
  Top 0.254: U20.2 67.91,55.85 68.2,56.13 69.85,56.13 70.07,56.35 U20.5
N$21
  Top 0.254: U21.2 53.44,55.85 53.72,56.13 55.37,56.13 55.59,56.35 U21.5
N$22
  Top 0.254: U22.2 38.96,55.85 39.24,56.13 40.89,56.13 41.11,56.35 U22.5
N$23
  Top 0.254: U23.2 24.48,55.85 24.77,56.13 26.42,56.13 26.63,56.35 U23.5
N$24
  Top 0.254: U24.2 10,55.85 10.29,56.13 11.94,56.13 12.15,56.35 U24.5
SCL
  Top 0.254: U1.8 12.15,13.97 | 12.15,13.97 12.15,12.79 12.04,12.68 J2.4 | R1.1 12.15,13.97
SCL1
  Top 0.254: U2.8 26.63,13.97 | 26.63,13.97 26.63,12.79 26.52,12.68 J1.4 | R3.1 26.63,13.97
SCL2
  Top 0.254: U3.8 41.11,13.97 | 41.11,13.97 41.11,12.79 41,12.68 J3.4 | R5.1 41.11,13.97
SCL3
  Top 0.254: U4.8 55.59,13.97 | 55.59,13.97 55.59,12.79 55.47,12.68 J4.4 | R7.1 55.59,13.97
SCL4
  Top 0.254: U5.8 70.07,13.97 | 70.07,13.97 70.07,12.79 69.95,12.68 J5.4 | R9.1 70.07,13.97
SCL5
  Top 0.254: U6.8 84.54,13.97 | 84.54,13.97 84.54,12.79 84.43,12.68 J6.4 | R11.1 84.54,13.97
SCL6
  Top 0.254: U7.8 81.32,27.18 | 81.32,27.18 81.32,28.36 81.43,28.47 J7.4 | R13.1 81.32,27.18
SCL7
  Top 0.254: U8.8 66.84,27.18 | 66.84,27.18 66.84,28.36 66.95,28.47 J8.4 | R15.1 66.84,27.18
SCL8
  Top 0.254: U9.8 52.36,27.18 | 52.36,27.18 52.36,28.36 52.47,28.47 J9.4 | R17.1 52.36,27.18
SCL9
  Top 0.254: U10.8 37.88,27.18 | 37.88,27.18 37.88,28.36 38,28.47 J10.4 | R19.1 37.88,27.18
SCL10
  Top 0.254: U11.8 23.41,27.18 | 23.41,27.18 23.41,28.36 23.52,28.47 J11.4 | R21.1 23.41,27.18
SCL11
  Top 0.254: U12.8 8.93,27.18 | 8.93,27.18 8.93,28.36 9.04,28.47 J12.4 | R23.1 8.93,27.18
SCL12
  Top 0.254: U13.8 12.15,45.47 | 12.15,45.47 12.15,44.28 12.04,44.17 J13.4 | R25.1 12.15,45.47
SCL13
  Top 0.254: U14.8 26.63,45.47 | 26.63,45.47 26.63,44.28 26.52,44.17 J14.4 | R27.1 26.63,45.47
SCL14
  Top 0.254: U15.8 41.11,45.47 | 41.11,45.47 41.11,44.28 41,44.17 J15.4 | R29.1 41.11,45.47
SCL15
  Top 0.254: U16.8 55.59,45.47 | 55.59,45.47 55.59,44.28 55.47,44.17 J16.4 | R31.1 55.59,45.47
SCL16
  Top 0.254: U17.8 70.07,45.47 | 70.07,45.47 70.07,44.28 69.95,44.17 J17.4 | R33.1 70.07,45.47
SCL17
  Top 0.254: U18.8 84.54,45.47 | 84.54,45.47 84.54,44.28 84.43,44.17 J18.4 | R35.1 84.54,45.47
SCL18
  Top 0.254: U19.8 81.32,58.67 | 81.32,58.67 81.32,59.86 81.43,59.97 J19.4 | R37.1 81.32,58.67
SCL19
  Top 0.254: U20.8 66.84,58.67 | 66.84,58.67 66.84,59.86 66.95,59.97 J20.4 | R39.1 66.84,58.67
SCL20
  Top 0.254: U21.8 52.36,58.67 | 52.36,58.67 52.36,59.86 52.47,59.97 J21.4 | R41.1 52.36,58.67
SCL21
  Top 0.254: U22.8 37.88,58.67 | 37.88,58.67 37.88,59.86 38,59.97 J22.4 | R43.1 37.88,58.67
SCL22
  Top 0.254: U23.8 23.41,58.67 | 23.41,58.67 23.41,59.86 23.52,59.97 J23.4 | R45.1 23.41,58.67
SCL23
  Top 0.254: U24.8 8.93,58.67 | 8.93,58.67 8.93,59.86 9.04,59.97 J24.4 | R47.1 8.93,58.67
SDA
  Top 0.254: J2.3 11.04,12.69 11.08,12.73 U1.7 11.08,16.03 11.56,16.51 R2.1
SDA1
  Top 0.254: J1.3 25.52,12.69 25.56,12.73 U2.7 25.56,16.03 26.04,16.51 R4.1
SDA2
  Top 0.254: J3.3 40,12.69 40.03,12.73 U3.7 40.03,16.03 40.51,16.51 R6.1
SDA3
  Top 0.254: J4.3 54.47,12.69 54.51,12.73 U4.7 54.51,16.03 54.99,16.51 R8.1
SDA4
  Top 0.254: J5.3 68.95,12.69 68.99,12.73 U5.7 68.99,16.03 69.47,16.51 R10.1
SDA5
  Top 0.254: J6.3 83.43,12.69 83.47,12.73 U6.7 83.47,16.03 83.95,16.51 R12.1
SDA6
  Top 0.254: J7.3 82.43,28.46 82.39,28.42 U7.7 82.39,25.12 81.91,24.64 R14.1
SDA7
  Top 0.254: J8.3 67.95,28.46 67.91,28.42 U8.7 67.91,25.12 67.44,24.64 R16.1
SDA8
  Top 0.254: J9.3 53.47,28.46 53.44,28.42 U9.7 53.44,25.12 52.96,24.64 R18.1
SDA9
  Top 0.254: J10.3 39,28.46 38.96,28.42 U10.7 38.96,25.12 38.48,24.64 R20.1
SDA10
  Top 0.254: J11.3 24.52,28.46 24.48,28.42 U11.7 24.48,25.12 24,24.64 R22.1
SDA11
  Top 0.254: J12.3 10.04,28.46 10,28.42 U12.7 10,25.12 9.53,24.64 R24.1
SDA12
  Top 0.254: J13.3 11.04,44.19 11.08,44.23 U13.7 11.08,47.53 11.56,48.01 R26.1
SDA13
  Top 0.254: J14.3 25.52,44.19 25.56,44.23 U14.7 25.56,47.53 26.04,48.01 R28.1
SDA14
  Top 0.254: J15.3 40,44.19 40.03,44.23 U15.7 40.03,47.53 40.51,48.01 R30.1
SDA15
  Top 0.254: J16.3 54.47,44.19 54.51,44.23 U16.7 54.51,47.53 54.99,48.01 R32.1
SDA16
  Top 0.254: J17.3 68.95,44.19 68.99,44.23 U17.7 68.99,47.53 69.47,48.01 R34.1
SDA17
  Top 0.254: J18.3 83.43,44.19 83.47,44.23 U18.7 83.47,47.53 83.95,48.01 R36.1
SDA18
  Top 0.254: J19.3 82.43,59.95 82.39,59.91 U19.7 82.39,56.61 81.91,56.13 R38.1
SDA19
  Top 0.254: J20.3 67.95,59.95 67.91,59.91 U20.7 67.91,56.61 67.44,56.13 R40.1
SDA20
  Top 0.254: J21.3 53.47,59.95 53.44,59.91 U21.7 53.44,56.61 52.96,56.13 R42.1
SDA21
  Top 0.254: J22.3 39,59.95 38.96,59.91 U22.7 38.96,56.61 38.48,56.13 R44.1
SDA22
  Top 0.254: J23.3 24.52,59.95 24.48,59.91 U23.7 24.48,56.61 24,56.13 R46.1
SDA23
  Top 0.254: J24.3 10.04,59.95 10,59.91 U24.7 10,56.61 9.53,56.13 R48.1

## Text on the board
Dimension: v-score | v-score | v-score | v-score | v-score | v-score | v-score | v-score
tPlace: SCL | SDA | 3V3 | GND | SCL | SDA | 3V3 | GND | SCL | SDA | 3V3 | GND | SCL | SDA | 3V3 | GND | SCL | SDA | 3V3 | GND | SCL | SDA | 3V3 | GND | GND | 3V3 | SDA | SCL | GND | 3V3 | SDA | SCL | GND | 3V3 | SDA | SCL | GND | 3V3 | SDA | SCL | GND | 3V3 | SDA | SCL | GND | 3V3 | SDA | SCL | SCL | SDA | 3V3 | GND | SCL | SDA | 3V3 | GND | SCL | SDA | 3V3 | GND | SCL | SDA | 3V3 | GND | SCL | SDA | 3V3 | GND | SCL | SDA | 3V3 | GND | GND | 3V3 | SDA | SCL | GND | 3V3 | SDA | SCL | GND | 3V3 | SDA | SCL | GND | 3V3 | SDA | SCL | GND | 3V3 | SDA | SCL | GND | 3V3 | SDA | SCL
bPlace: Robotic / Finger / Sensor | Robotic / Finger / Sensor | Robotic / Finger / Sensor | Robotic / Finger / Sensor | Robotic / Finger / Sensor | Robotic / Finger / Sensor | Robotic / Finger / Sensor | Robotic / Finger / Sensor | Robotic / Finger / Sensor | Robotic / Finger / Sensor | Robotic / Finger / Sensor | Robotic / Finger / Sensor | Robotic / Finger / Sensor | Robotic / Finger / Sensor | Robotic / Finger / Sensor | Robotic / Finger / Sensor | Robotic / Finger / Sensor | Robotic / Finger / Sensor | Robotic / Finger / Sensor | Robotic / Finger / Sensor | Robotic / Finger / Sensor | Robotic / Finger / Sensor | Robotic / Finger / Sensor | Robotic / Finger / Sensor